# Altium PCB PCBv2.PcbDoc (part 1 of 2)
Units mil, origin at the board's own origin, x right, y up, seen from the top; angles counter-clockwise.
Board outline 3700.79 x 5244.09 mil, 2 copper layers (Top Layer, Bottom Layer); 35 components, 39 nets, 108 pads, 2885 vias.
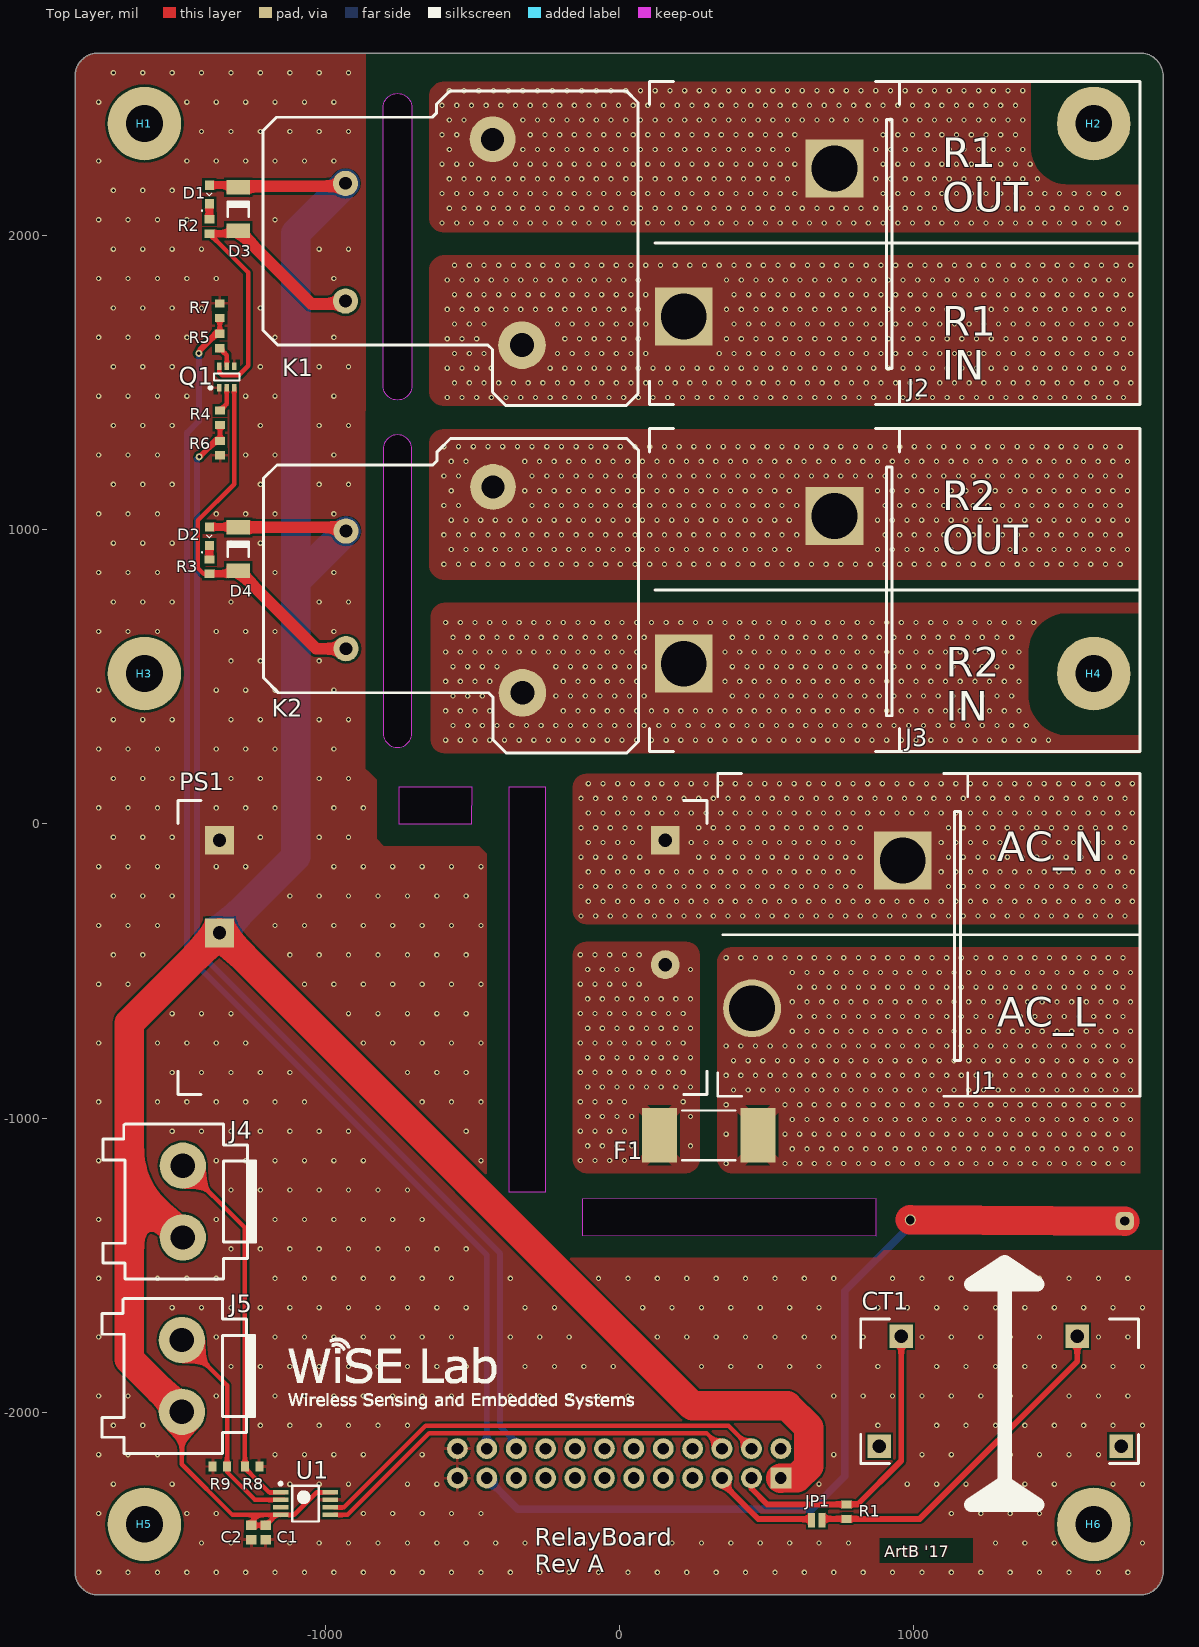
[diagram p0: Top Layer view]
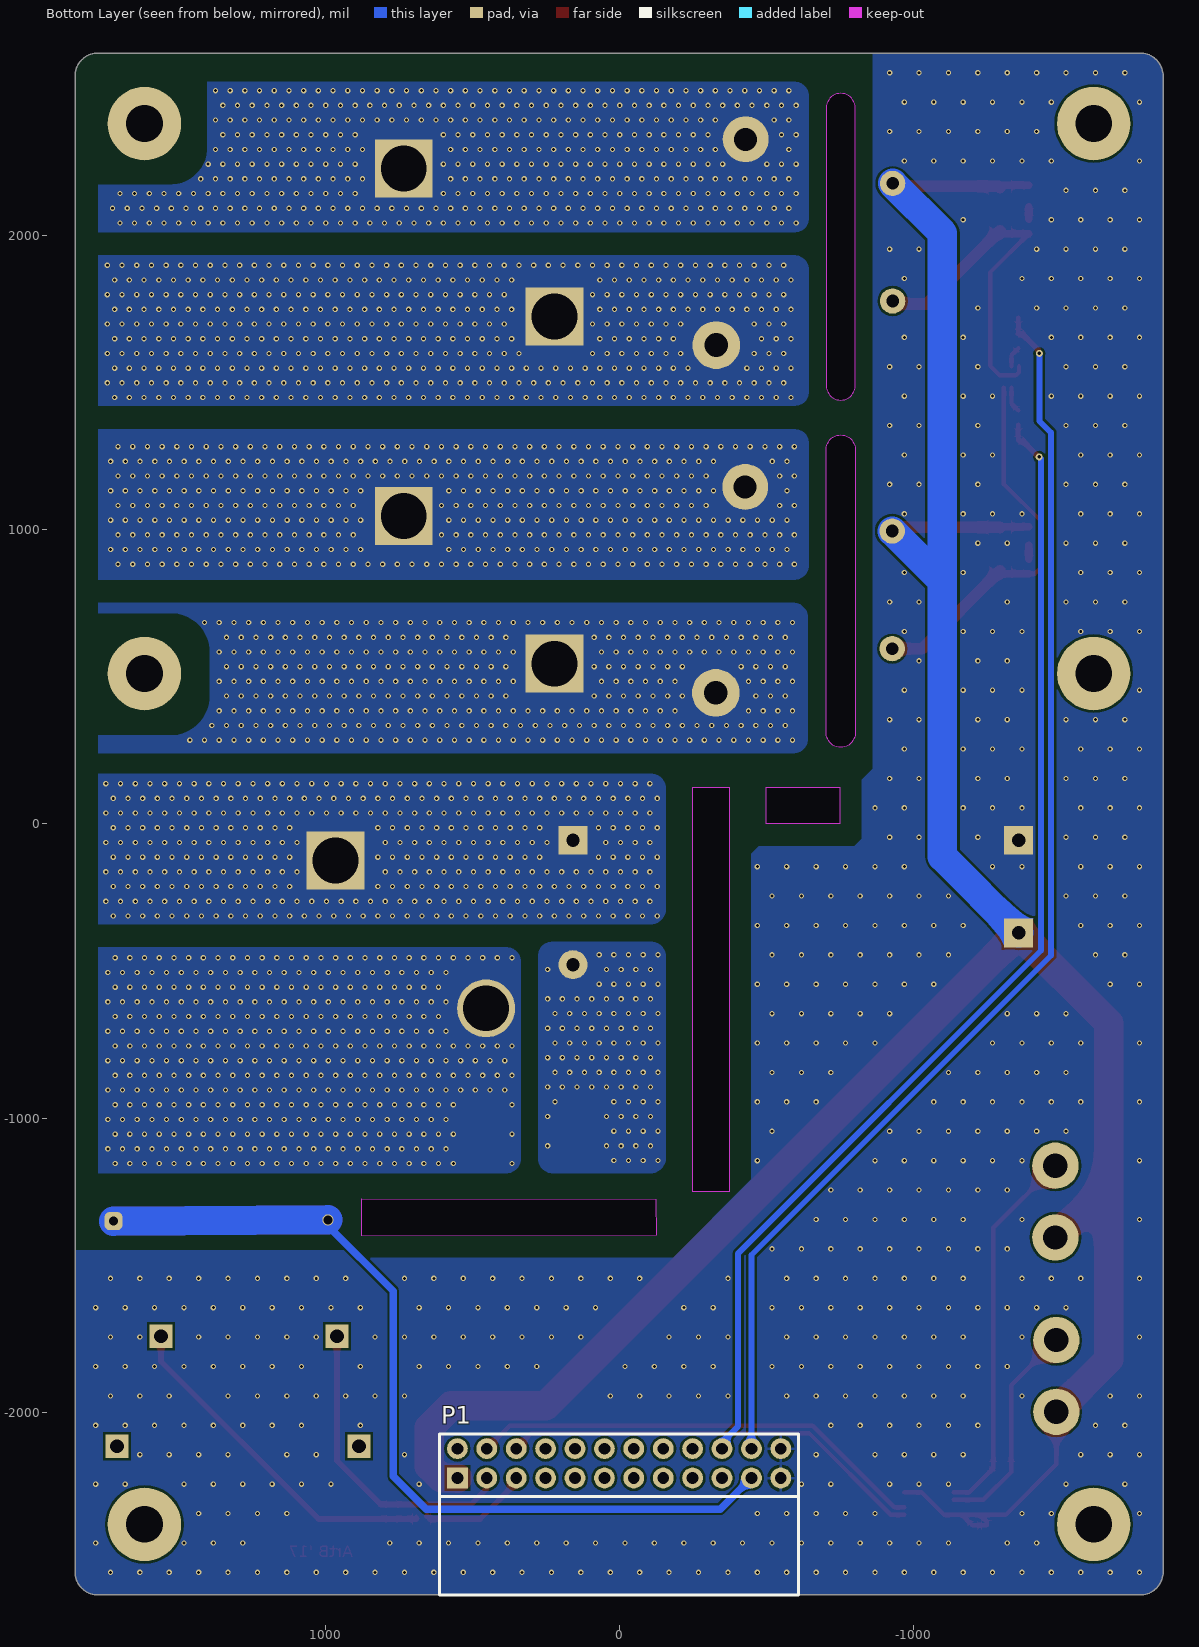
[diagram p1: Bottom Layer view, seen from below]

## Layer stack, top to bottom
Top Solder: solder mask 0.4, Solder Resist, Dk 3.5
Top Layer: signal copper 1.4
Dielectric 1: dielectric 12.6, FR-4, Dk 4.8
Bottom Layer: signal copper 1.4
Bottom Solder: solder mask 0.4, Solder Resist, Dk 3.5

## Board outline
-688.98,2622.05 688.98,2622.05 1771.65,2622.05 cw(c1771.65,2543.31) 1850.39,2543.31 1850.39,-2543.31 cw(c1771.65,-2543.31) 1771.65,-2622.05 -1771.65,-2622.05 cw(c-1771.65,-2543.31) -1850.39,-2543.31 -1850.39,2543.31 cw(c-1771.65,2543.31) -1771.65,2622.05
cut-out: -250.13,124.57 -375.34,124.31 -374.99,-1249.99 -250,-1249.99
cut-out: -500,125 -750,125 -750,0 -500.6,1.18
cut-out: -124.97,-1275.61 -125.78,-1399.14 875.03,-1399.98 875,-1275
cut-out: -802.89,1490.75 -802.89,2435.63 cw(c-753.67,2435.63) -753.67,2484.85 cw(c-753.67,2435.63) -704.46,2435.63 -704.46,1490.75 cw(c-753.67,1490.75) -753.67,1441.54 cw(c-753.67,1490.75)
cut-out: -753.67,1323.43 ccw(c-753.67,1274.22) -802.89,1274.22 -802.89,309.65 ccw(c-753.67,309.65) -753.67,260.44 ccw(c-753.67,309.65) -704.46,309.65 -704.46,1274.22 ccw(c-753.67,1274.22)

## Design rules (kind name [scope] priority, off if disabled: settings)
Clearance [All] p1: gap=8 ignorepadtopadclearanceinfootprint=FALSE
ComponentClearance "Ignore Enclosure Part" [InComponent('H1')] p1: gap=0 collisioncheckmode=3 verticalgap=0 showdistances=FALSE
HoleSize [All] p1: absolutevalues=TRUE maxlimit=200 minlimit=8 maxpercent=80.000 minpercent=20.000
HoleToHoleClearance [All] p1: gap=12 allowstackedmicrovias=TRUE
MinimumSolderMaskSliver MinimumSolderMaskSliver_jumpers [HasFootprint('PAD-JUMPER-2-NO_NO_SILK')] p1: minsoldermaskwidth=2
MinimumSolderMaskSliver [All] p2: minsoldermaskwidth=4
PolygonConnect PolygonConnect_Vias [(ObjectKind = 'Via') And (Net = 'GND') And (AsMils(ViaDiameter) = 18) And (AsMils(HoleDiameter) = 10) And (PadViaLibraryTemplate = 'v46h25m0mx0(1)')] p1: connectstyle=Direct reliefconductorwidth=10 reliefentries=4 polygonreliefangle="90 Angle" airgapwidth=10
PolygonConnect PolygonConnect_PS1 [HasFootprint('IRM-10-5')] p2: connectstyle=Direct reliefconductorwidth=40 reliefentries=4 polygonreliefangle="45 Angle" airgapwidth=10
PolygonConnect PolygonConnect_fUSE [HasFootprint('FUSE M10742X40L Schurter UMK 250 Series')] p3: connectstyle=Relief reliefconductorwidth=40 reliefentries=4 polygonreliefangle="45 Angle" airgapwidth=10
PolygonConnect PolygonConnect_HV [InNet('NEtF1_1') OR InNet('NetF1_2') OR InNet('NetJ1_2')  OR InNet('NetJ3_1')  OR InNet('NetJ3_2')  OR InNet('NetJ2_1')   OR InNet('NetJ2_2')] p4: connectstyle=Direct reliefconductorwidth=10 reliefentries=4 polygonreliefangle="90 Angle" airgapwidth=10
PolygonConnect [All] p5: connectstyle=Relief reliefconductorwidth=10 reliefentries=4 polygonreliefangle="90 Angle" airgapwidth=10
RoutingVias [All] p1: holewidth=28 width=50 viastyle="Through Hole" minholewidth=10 minwidth=20 maxholewidth=28 maxwidth=50
SilkToSilkClearance [All] p1: silktosilkclearance=8
SilkToSolderMaskClearance [IsPad] p1: minsilkscreentomaskgap=2 clearancetoexposedcopper=TRUE
SolderMaskExpansion [All] p1: expansion=4
Width [All] p1: maxlimit=500 minlimit=8 preferedwidth=25
24 further rules are at their usual default settings.

## Classes and differential pairs
polygon class PolygonClass_1: NETJ2_2_L01_P032
polygon class PolygonClass_2: NETJ2_2_L01_P032 NETJ2_2_L02_P060

## Components (designator, comment, footprint, x,y, rotation, side; value= is the part's Value field where it differs from the comment)
C1 "4.7uF" "CAPC1608X09L - CAP0603" -1201.5,-2409.81 r90 top
C2 "0.1uF" "CAPC1608X09L - CAP0603" -1250.75,-2409.81 r90 top
CT1 "Current Transformer" CT-CR8348 959.57,-1742.01 r0 top locked
D1 "Led Red" "LED-0603 .7MM TALL" -1393.44,2141.11 r90 top
D2 "Led Red" "LED-0603 .7MM TALL" -1393.44,978.94 r90 top
D3 "Diode" "SOD-80  MiniMELF" -1295.01,2091.14 r270 top
D4 "Diode" "SOD-80  MiniMELF" -1295.01,934.65 r270 top
F1 "Fuse 500mA" "FUSE M10742X40L Schurter UMK 250 Series" 304.7,-1058.69 r180 top
H1 "1/8in Hole by 1/4in Ring Fastener" "1/8in Fastener Hole"#1 -1614.17,2381.89 r0 top
H2 "1/8in Hole by 1/4in Ring Fastener" "1/8in Fastener Hole"#1 1614.17,2381.89 r0 top
H3 "1/8in Hole by 1/4in Ring Fastener" "1/8in Fastener Hole"#2 -1415.44,819.2 r0 top
H4 "1/8in Hole by 1/4in Ring Fastener" "1/8in Fastener Hole"#3 1409.91,829.91 r0 top
H5 "1/8in Hole by 1/4in Ring Fastener" "1/8in Fastener Hole"#4 -193.77,-1148.49 r0 top
H6 "1/8in Hole by 1/4in Ring Fastener" "1/8in Fastener Hole"#1 1614.17,-2381.89 r0 top
J1 "High Voltage Connector" "2POS Barrier Block Terminal"#1 452.22,-626.82 r90 top locked
J2 "High Voltage Connector" "2POS Barrier Block Terminal"#2 220.03,1726.34 r90 top locked (schematic designator J3)
J3 "High Voltage Connector" "2POS Barrier Block Terminal"#2 220.03,545.23 r90 top locked (schematic designator J4)
J4 "Thrmistor Connector" "2POS JST B02P-VL" -1483.78,-1284.13 r270 top locked
J5 "Thrmistor Connector" "2POS JST B02P-VL" -1487.04,-1876.99 r270 top locked
JP1 "JUMPER-PAD-2-NO" PAD-JUMPER-2-NO_NO_SILK 672.2,-2367.61 r0 top
K1 "Power Relay" T9AS1D12-5 -655.45,1953.55 r270 top locked
K2 "Power Relay" T9AS1D12-5 -653.87,771.26 r270 top locked
P1 "0.1\" Pitch, 2 Row, 24 Pos, Female, Right-Angle" "0.1 INCH 2 ROW 24 POS FEMALE RIGHT-ANGLE HEADER SULLINS" 0,-2174.41 r180 bottom locked
PS1 "AC/DC Power Supply" IRM-10-5 298.68,-919.49 r180 top
Q1 "NPN MOSFET" "SC-70-6  (SOT-363)" -1334.38,1520.28 r90 top
R1 "VAL?" "RESC1608X06L - RES0603" 773.45,-2338.6 r90 top
R2 "150" "RESC1608X06L - RES0603" -1393.44,2032.09 r90 top (schematic designator R1)
R3 "150" "RESC1608X06L - RES0603" -1393.44,875.59 r90 top (schematic designator R2)
R4 "1K" "RESC1608X06L - RES0603" -1357.09,1381.89 r90 top
R5 "1K" "RESC1608X06L - RES0603" -1358.13,1642.65 r270 top
R6 "10K" "RESC1608X06L - RES0603" -1357.09,1278.54 r90 top
R7 "10K" "RESC1608X06L - RES0603" -1358.13,1746 r270 top
R8 "10K" "RESC1608X06L - RES0603" -1248.06,-2184.7 r180 top
R9 "10K" "RESC1608X06L - RES0603" -1357.95,-2185.1 r0 top
U1 "ADC" "8L UMAX/USOP TSOP65P490X110-8L" -1066.65,-2311.17 r0 top

## Footprints (in the part's own frame and the unit in brackets; to place one, negate y for a bottom-side part, rotate by r counter-clockwise, add the part's x,y. Pads: shape width x height; smd on the part's side, far side on the other; paste and mask are expansions set on the pad)
"0.1 INCH 2 ROW 24 POS FEMALE RIGHT-ANGLE HEADER SULLINS" [mm] "Sullins 0.1\" Dual row 24 position female right-angle header"
  rect 1.8x1.8 hole 1.02: 1(-13.97,-1.27)
  round 1.8 hole 1.02: 2(-13.97,1.27) 3(-11.43,-1.27) 4(-11.43,1.27) 5(-8.89,-1.27) 6(-8.89,1.27) 7(-6.35,-1.27) 8(-6.35,1.27) 9(-3.81,-1.27) 10(-3.81,1.27) 11(-1.27,-1.27) 12(-1.27,1.27) 13(1.27,-1.27) 14(1.27,1.27) 15(3.81,-1.27) 16(3.81,1.27) 17(6.35,-1.27) 18(6.35,1.27) 19(8.89,-1.27) 20(8.89,1.27) 21(11.43,-1.27) 22(11.43,1.27) 23(13.97,-1.27) 24(13.97,1.27)
  silkscreen extent -15.5,-11.37 15.5,2.54, body extent -15.49,-11.34 15.49,1.5, height 5.08
"1/8in Fastener Hole"#1 [mil]
  round 250 hole 125: 1(0,0)
"1/8in Fastener Hole"#2 [mil]
  round 250 hole 125: 1(-198.73,-307.39)
"1/8in Fastener Hole"#3 [mil]
  round 250 hole 125: 1(204.27,-318.1)
"1/8in Fastener Hole"#4 [mil]
  round 250 hole 125: 1(-1420.4,-1233.4)
"2POS Barrier Block Terminal"#1 [mm] "CONN BARRIER STRIP 2CIRC 0.5\""
  round 5 hole 3.96: 1(0,0)
  rect 5x5 hole 3.96: 2(12.766,-13.018)
  silkscreen extent -7.6,-18.63 20.3,2.97, body extent -7.64,-18.62 20.3,2.97, height 22.61
"2POS Barrier Block Terminal"#2 [mm] "CONN BARRIER STRIP 2CIRC 0.5\""
  rect 5x5 hole 3.96: 1(0,0) 2(12.766,-13.018)
  silkscreen extent -7.6,-18.63 20.3,2.97, body extent -7.64,-18.62 20.3,2.97, height 22.61
"2POS JST B02P-VL" [mm] "CONN HEADER 2POS VL SERIES TIN"
  round 4 hole 2.1: 1(-3.1,0) 2(3.1,0)
  silkscreen extent -6.7,-6.9 6.7,6.3, body extent -6.7,-6.9 6.7,6.3, height 16.4
"8L UMAX/USOP TSOP65P490X110-8L" [mm] "TSOP, 8-Leads, Body 3.00x3.00mm, Pitch 0.65mm, IPC High Density"
  rect 1.35x0.4 smd mask+0.051: 1(-2.15,0.975) 2(-2.15,0.325) 3(-2.15,-0.325) 4(-2.15,-0.975) 5(2.15,-0.975) 6(2.15,-0.325) 7(2.15,0.325) 8(2.15,0.975)
  silkscreen extent -2.27,-1.55 1.15,1.85, body extent -2.51,-1.55 2.52,1.55, height 1.09
"CAPC1608X09L - CAP0603" [mm] "Chip Capacitor, 2-Leads, Body 1.60x0.80mm, IPC High Density"
  rect 0.8x0.9 smd: 1(-0.625,0) 2(0.625,0)
  body extent -0.87,-0.48 0.87,0.48, height 0.9
CT-CR8348 [mm] "TRANSF CURRENT .27\" OPENING PCB CR8348-2000"
  rect 2x2 hole 1.2: 1(0,0) 2(15.2,0) ""(-1.9,-9.5) ""(19,-9.5)
  silkscreen extent -3.5,-11 20.5,1.5, body extent -3.5,-10.1 20.5,0.6, height 25
"FUSE M10742X40L Schurter UMK 250 Series" [mm] "Molded Capacitor, 2-Leads, Body 10.70x4.20mm, IPC High Density"
  rect 3x4.7 smd: 1(-4.25,0) 2(4.25,0)
  silkscreen extent -2.29,-2.15 2.29,2.15, body extent -5.65,-2.11 5.65,2.09, height 3.97
IRM-10-5 [mm] "AC/DC Power Modules 5V 2A 10W 85-264Vin Encap PS"
  round 2.5 hole 1.15: AC1(3.6,-11.2)
  rect 2.5x2.5 hole 1.15: AC2(3.6,-21.95) V+(42.1,-13.95) V-(42.1,-21.95)
  silkscreen extent 0,-25.4 45.7,0, body extent 0,-25.4 45.7,0, height 21.5
"LED-0603 .7MM TALL" [mm] "Chip Diode, 2-Leads, Body 1.60x0.80mm, IPC High Density"
  rect 0.8x0.8 smd: A(0.8,0) K(-0.8,0)
  silkscreen extent -1.45,-0.25 0.13,0.68, body extent -1.01,-0.54 1.01,0.53, height 0.6
PAD-JUMPER-2-NO_NO_SILK [mil]
  rect 25x50 smd: 1(-17.72,0) 2(17.72,0)
"RESC1608X06L - RES0603" [mm] "Chip Resistor, 2-Leads, Body 1.60x0.80mm, IPC High Density"
  rect 0.7x0.85 smd: 1(-0.625,0) 2(0.625,0)
  body extent -0.87,-0.48 0.87,0.48, height 0.55
"SC-70-6  (SOT-363)" [mm] "TSOP, 6-Leads, Body 2.00x1.25mm, Pitch 0.65mm, IPC High Density"
  rect 0.648x0.406 smd mask+0.051: 1(-0.919,0.65) 2(-0.919,0) 3(-0.919,-0.65) 4(0.919,-0.65) 5(0.919,0) 6(0.919,0.65)
  silkscreen extent -1.04,-1.1 0.3,1.53, body extent -1.05,-1.1 1.05,1.1, height 1
"SOD-80  MiniMELF" [mm] "MELF Diode, 2-Leads, Body 3.50x1.50mm, IPC High Density"
  rect 1.25x2 smd: 1(-1.875,0) 2(1.875,0)
  silkscreen extent -0.65,-0.9 0.65,0.9, body extent -1.75,-0.75 1.75,0.75, height 1.5
T9AS1D12-5 [mil] "RELAY GEN PURPOSE SPST 30A 5V"
  round 162 hole 81: 1(325,325)
  round 156 hole 78: 2(-375,225)
  round 86 hole 43: 3(175,-275) 4(-225,-275)
  silkscreen extent -540,-555 530,720, body extent -545,-555 535,725, height 806

## Part data
C1: library part "CAP0603 4.7uF 10% 6.3V X7R", "SMT 0603 Ceramic Capacitor", Supplier Part Number 1=1276-2087-1-ND, TempCoeff=X7R, Tolerance=10%, Voltage=6.3V, Supplier 1=Digi-Key
C2: library part "CAP0603 0.1uF 10% 25V X7R", "SMT 0603 Ceramic Capacitor", Supplier Part Number 1=311-1341-1-ND, TempCoeff=X7R, Tolerance=10%, Voltage=25V, Supplier 1=Digi-Key, Supplier 2=Digi-Key, Supplier Part Number 2=490-1524-1-ND
CT1: library part "CT CR8348-2000", "TRANSF CURRENT .27\" OPENING PCB 50A", Supplier Part Number 1=582-1010-ND, Supplier 1=Digi-Key, url=https://www.digikey.com/product-detail/en/cr-magnetics-inc/CR8348-2000/582-1010-ND/1045166
D1 D2: library part "LED0603 RED 20mA 250mcd", "LED RED CLEAR 0603 SMD 250 mcd", Supplier Part Number 1=732-4978-1-ND, Supplier 1=Digi-Key
D3 D4: library part "Diode LL4150GS18", "DIODE GEN 50V 600MA MINI MELF", Supplier Part Number 1=LL4150GS18GICT-ND, Supplier 1=Digi-Key
F1: library part FUSE-Schurter-3404.2463.22, "FUSE UMK 250 FUSE WITH HOLDER 500MA F", Supplier Part Number 1=486-3187-1-ND, Supplier 1=Digi-Key, url=https://www.digikey.com/product-detail/en/3404.2463.22/486-3187-1-ND/5225261?curr=usd&WT.z_cid=ref_octopart_dkc_buynow&site=us
H1 H2 H3 H4 H5 H6: library part "1/8in by 1/4in Fastner Hole"
J1 J2 J3: library part "2POS CONN BARRIER STRIP 2CIRC 0.5\" 45A 600V", "MOLEX  0386608802", Supplier Part Number 1=WM4395-ND, Supplier 1=Digi-Key, url=http://www.mouser.com/ProductDetail/Molex/38660-8802/?qs=sGAEpiMZZMsntO7gZZwOWBznzzIjRi3IH61qEmgvOKA%3d
J4 J5: library part "2POS Thermistor Connector B02P-VL", "JST B02P-VL CONN HEADER 2POS VL SERIES TIN", Supplier Part Number 1=455-2361-ND, Supplier 1=Digi-Key, url=https://www.digikey.com/products/en?mpart=B02P-VL&v=455
K1 K2: library part T9AS1D12-5, "Single-Pole Single-Throw Relay", Supplier Part Number 1=PB1014-ND, Part Number=T9AS1D12-5, Supplier 1=Digi-Key
P1: library part "0.1\" 2 row 24 position female right-angle header sullins", "Sullins 0.1\" 2 row 24 position female right-angle header", Supplier Part Number 1=S5526-ND, Pitch=2.54mm, Positions=24, Rows=2, Supplier 1=Digi-Key, Supplier 2=Digi-Key, Supplier Part Number 2=S5565-ND
PS1: library part IRM-10-5, "AC/DC Power Modules 5V 2A 10W 85-264Vin Encap PS", Supplier Part Number 1=70387823, Mouser Link=http://www.mouser.com/ProductDetail/Mean-Well/IRM-10-5/?qs=sGAEpiMZZMuWiaalG5TUgH52QN1%252bIKAVGLeN4i9HrWU2QI8q%2fOO4Cw%3d%3d, Supplier 1=Allied, Supplier 2=Mouser, Supplier Part Number 2="Anonymous Daily Limit Reached"
Q1: library part SI1922EDH-T1-GE3CT, "2N-CH NPN MOSFET 20V 1.3A SOT-363", Supplier Part Number 1=SI1922EDH-T1-GE3CT-ND, Supplier 1=Digi-Key
R1: library part RES0603, "SMT 0603 Ceramic Resistor"
R2 R3: library part "RES0603 150 1% 1/10W_1", "SMT 0603 Ceramic Resistor", Supplier Part Number 1=311-150HRCT-ND, Supplier 1=Digi-Key
R4 R5: library part "RES0603 1K 1% 1/10W", "SMT 0603 Ceramic Resistor", Power=1/10W, Supplier Part Number 1=311-1.00KHRCT-ND, Tolerance=1%, Supplier 1=Digi-Key, Supplier 2=Digi-Key, Supplier 3=Digi-Key, Supplier Part Number 2=P1.00KHCT-ND, Supplier Part Number 3=RMCF0603FG1K00CT-ND
R6 R7 R8 R9: library part "RES0603 10K 1% 1/10W", "SMT 0603 Ceramic Resistor", Power=1/10W, Supplier Part Number 1=311-10.0KHRCT-ND, Tolerance=1%, Supplier 1=Digi-Key, Supplier 2=Digi-Key, Supplier 3=Digi-Key, Supplier Part Number 2=RMCF0603FT10K0CT-ND, Supplier Part Number 3=P10.0KHCT-ND
U1: library part MAX11612EUA+, "IC ADC I2C/SRL 12BIT 4CH 8UMAX", Supplier Part Number 1=MAX11612EUA+-ND, Supplier 1=Digi-Key, url=https://www.digikey.com/product-detail/en/maxim-integrated/MAX11612EUA-/MAX11612EUA--ND/2061925

## Free pads (board coordinates)
  round 24 hole 12: 2(-1428.57,1248.52) 3(-1429.25,1600.59)
  round 38 hole 30: 4(990.39,-1346.49)
  rrect60% 62x62 hole 31: 4(1719.62,-1350.46)

## Via types
v1: diameter 18, hole 10, Top Layer to Bottom Layer, tented both sides, 2885 vias

## Nets (pads, with @x,y where several pads share a name; then routed paths per layer and width w, separated by ;. In a path a pad name is that pad's centre, name@x,y a point inside that pad or via, vN(x,y) a via of type N, cw(c..) or ccw(c..) an arc to the next point about the centre after c; other vN are vias at no path point)
3.3V: P1.2
5V: C1.2 C2.2 D1.A D2.A D3.1 D4.1 J4.2 J5.2 K1.4 K2.4 P1.1 PS1.V+ U1.4 U1.8 | length 9910.8
  Top Layer w10: D4.1@-1296.69,1010.66 -1296.98,1010.44 D4.1@-1277.3,1010.44
  Top Layer w15: J5.2@-1487.04,-1999.04 -1487.04,-2177.53 -1314.9,-2349.67 -1226.83,-2349.67 ; U1.4@-1151.3,-2349.67 -1138.75,-2349.67 -1138.75,-2349.45 -1104.93,-2349.45 -1028.38,-2272.9 U1.8@-969.46,-2272.9 ; -1226.83,-2349.67 -1250.75,-2373.59 C2.2@-1250.75,-2385.21 C1.2@-1201.5,-2385.21 U1.4@-1165.96,-2349.67 ; -1226.83,-2349.67 U1.4@-1165.96,-2349.67 ; U1.4@-1165.96,-2349.67 -1151.41,-2349.67 U1.4@-1151.3,-2349.56 -1165.85,-2349.56 U1.4@-1165.96,-2349.67
  Top Layer w25: D2.A@-1393.44,1010.44 D4.1@-1296.98,1010.44 ; D1.A@-1393.44,2172.6 -1302.65,2172.6 D3.1@-1295.01,2164.96
  Top Layer w40: D4.1@-1295.01,1008.47 -1295.01,1008.98 -941.59,1008.98 K2.4@-928.87,996.26 ; D3.1@-1295.01,2164.96 -1291.27,2168.7 K1.4@-930.45,2168.7
  Top Layer w100: J5.2@-1487.04,-1999.04 -1665.3,-1820.77 -1665.3,-1224.66 ; J4.2@-1483.78,-1406.18 -1665.3,-1224.66 ; P1.1@550,-2224.41 549.34,-2224.32 604.26,-2224.32 645.43,-2183.9 645.43,-2052.58 571.83,-1978.98 249.9,-1978.98 PS1.V+@-1358.8,-370.28 -1665.3,-676.78 -1665.3,-1224.66
  Bottom Layer w100: PS1.V+@-1358.8,-370.28 -1099.44,-110.91 -1099.44,834.71 ; K1.4@-930.45,2178.55 -1099.44,2009.56 -1099.44,834.71 ; K2.4@-928.87,996.26 -1090.43,834.71 -1099.44,834.71
60HzAnt: P1.21 pad.4 | length 2271.7
  Bottom Layer w25: P1.21@-450,-2224.41 -344.37,-2330.04 655.82,-2330.04 767.94,-2217.91 767.94,-1588.24 990.39,-1365.79 pad.4@990.39,-1346.49
AIN0: J4.1 R8.2 U1.1 | length 1284
  Top Layer w15: J4.1@-1483.78,-1162.08 -1272.66,-1373.21 R8.2@-1272.66,-2184.7 -1272.66,-2190.74 -1190.51,-2272.9 U1.1@-1138.75,-2272.9
AIN1: J5.1 R9.2 U1.2 | length 746.3
  Top Layer w15: J5.1@-1487.04,-1754.94 -1333.34,-1908.64 R9.2@-1333.34,-2185.1 -1333.34,-2203.77 -1238.62,-2298.49 U1.2@-1138.75,-2298.49
CT_N: JP1.1 P1.5 | length 375.5
  Top Layer w20: P1.5@350,-2224.41 350,-2240.57 473.3,-2363.87 643.2,-2363.87 JP1.1@653.86,-2353.21
CT_P: CT1.1 P1.3 R1.2 | length 1052.6
  Top Layer w20: P1.3@450,-2224.41 450,-2260.14 503.86,-2313.99 R1.2@773.45,-2313.99 811.04,-2313.99 959.57,-2165.46 CT1.1@959.57,-1742.01
GND: C1.1 C2.1 P1.23 P1.24 PS1.V- Q1.1 Q1.4 R6.1 R7.1 R8.1 R9.1 U1.7
  other v1: -1770,-2545 -1670,-2545 -1570,-2545 -1470,-2545 -1370,-2545 -1270,-2545 -1170,-2545 -1070,-2545 -970,-2545 -870,-2545 -770,-2545 -670,-2545 -570,-2545 -470,-2545 -370,-2545 -270,-2545 -170,-2545 -70,-2545 30,-2545 130,-2545 230,-2545 330,-2545 430,-2545 530,-2545 630,-2545 730,-2545 830,-2545 930,-2545 1030,-2545 1130,-2545 1230,-2545 1330,-2545 1430,-2545 1530,-2545 1630,-2545 1730,-2545 -1420,-2445 -1320,-2445 -1120,-2445 -1020,-2445 -920,-2445 -820,-2445 -720,-2445 -620,-2445 -520,-2445 -420,-2445 -320,-2445 -220,-2445 -120,-2445 -20,-2445 80,-2445 180,-2445 280,-2445 380,-2445 480,-2445 580,-2445 680,-2445 780,-2445 1280,-2445 1380,-2445 1480,-2445 1780,-2445 -1770,-2345 -1470,-2345 -1370,-2345 -870,-2345 -770,-2345 -670,-2345 -570,-2345 -470,-2345 1130,-2345 1230,-2345 1330,-2345 1430,-2345 -1720,-2245 -1520,-2245 -1120,-2245 -1020,-2245 -920,-2245 -720,-2245 -620,-2245 680,-2245 980,-2245 1080,-2245 1180,-2245 1280,-2245 1380,-2245 1480,-2245 1680,-2245 1780,-2245 -1770,-2145 -1670,-2145 -1570,-2145 -1170,-2145 -1070,-2145 -970,-2145 -870,-2145 -670,-2145 730,-2145 1030,-2145 1130,-2145 1330,-2145 1430,-2145 1530,-2145 1630,-2145 -1720,-2045 -1620,-2045 -1220,-2045 -1120,-2045 -1020,-2045 -920,-2045 -820,-2045 -720,-2045 880,-2045 1080,-2045 1180,-2045 1280,-2045 1380,-2045 1480,-2045 1580,-2045 1680,-2045 1780,-2045 -1770,-1945 -1670,-1945 -1370,-1945 -1170,-1945 -1070,-1945 -970,-1945 -870,-1945 -770,-1945 -670,-1945 -570,-1945 -370,-1945 -270,-1945 -170,-1945 -70,-1945 30,-1945 730,-1945 830,-1945 930,-1945 1030,-1945 1130,-1945 1230,-1945 1330,-1945 1530,-1945 1630,-1945 1730,-1945 -1320,-1845 -1220,-1845 -1120,-1845 -1020,-1845 -920,-1845 -820,-1845 -720,-1845 -620,-1845 -520,-1845 -320,-1845 -220,-1845 -120,-1845 -20,-1845 280,-1845 380,-1845 480,-1845 580,-1845 680,-1845 880,-1845 1080,-1845 1180,-1845 1280,-1845 1380,-1845 1480,-1845 1580,-1845 1680,-1845 1780,-1845 -1770,-1745 -1370,-1745 -1170,-1745 -1070,-1745 -970,-1745 -870,-1745 -770,-1745 -670,-1745 -570,-1745 -370,-1745 -270,-1745 -170,-1745 130,-1745 230,-1745 330,-1745 430,-1745 530,-1745 630,-1745 730,-1745 830,-1745 1030,-1745 1130,-1745 1230,-1745 1330,-1745 1430,-1745 1630,-1745 1730,-1745 -1520,-1645 -1420,-1645 -1320,-1645 -1220,-1645 -1120,-1645 -1020,-1645 -920,-1645 -820,-1645 -720,-1645 -620,-1645 -520,-1645 -320,-1645 -220,-1645 80,-1645 180,-1645 280,-1645 380,-1645 480,-1645 580,-1645 680,-1645 880,-1645 980,-1645 1080,-1645 1180,-1645 1280,-1645 1380,-1645 1480,-1645 1580,-1645 1680,-1645 1780,-1645 -1770,-1545 -1570,-1545 -1470,-1545 -1370,-1545 -1170,-1545 -1070,-1545 -970,-1545 -870,-1545 -770,-1545 -670,-1545 -570,-1545 -370,-1545 -70,-1545 30,-1545 130,-1545 230,-1545 330,-1545 430,-1545 530,-1545 630,-1545 730,-1545 930,-1545 1030,-1545 1130,-1545 1230,-1545 1330,-1545 1430,-1545 1530,-1545 1630,-1545 1730,-1545 -1320,-1445 -1220,-1445 -1120,-1445 -1020,-1445 -920,-1445 -820,-1445 -720,-1445 -620,-1445 -520,-1445 -1770,-1345 -1370,-1345 -1170,-1345 -1070,-1345 -970,-1345 -870,-1345 -770,-1345 -670,-1345 -1320,-1245 -1220,-1245 -1120,-1245 -1020,-1245 -920,-1245 -820,-1245 -720,-1245 -1770,-1145 -1370,-1145 -1270,-1145 -1170,-1145 -1070,-1145 -970,-1145 -870,-1145 -470,-1145 -1520,-1045 -1420,-1045 -1320,-1045 -1220,-1045 -1120,-1045 -1020,-1045 -920,-1045 -520,-1045 -1770,-945 -1570,-945 -1470,-945 -1370,-945 -1270,-945 -1170,-945 -1070,-945 -670,-945 -570,-945 -470,-945 -1520,-845 -1420,-845 -1320,-845 -1220,-845 -1120,-845 -720,-845 -620,-845 -520,-845 -1770,-745 -1570,-745 -1470,-745 -1370,-745 -1270,-745 -870,-745 -770,-745 -670,-745 -570,-745 -470,-745 -1520,-645 -1420,-645 -1320,-645 -920,-645 -820,-645 -720,-645 -620,-645 -520,-645 -1770,-545 -1670,-545 -1070,-545 -970,-545 -870,-545 -770,-545 -670,-545 -570,-545 -470,-545 -1720,-445 -1620,-445 -1120,-445 -1020,-445 -920,-445 -820,-445 -720,-445 -620,-445 -520,-445 -1770,-345 -1670,-345 -1570,-345 -1170,-345 -1070,-345 -970,-345 -870,-345 -770,-345 -670,-345 -570,-345 -470,-345 -1720,-245 -1620,-245 -1520,-245 -1120,-245 -1020,-245 -920,-245 -820,-245 -720,-245 -620,-245 -520,-245 -1770,-145 -1670,-145 -1570,-145 -1370,-145 -1270,-145 -970,-145 -870,-145 -770,-145 -670,-145 -570,-145 -470,-145 -1720,-45 -1620,-45 -1520,-45 -1220,-45 -1020,-45 -920,-45 -1770,55 -1670,55 -1570,55 -1370,55 -1270,55 -1170,55 -970,55 -870,55 -1720,155 -1620,155 -1520,155 -1320,155 -1220,155 -1020,155 -920,155 -1770,255 -1670,255 -1570,255 -1370,255 -1270,255 -1170,255 -970,255 -1720,355 -1620,355 -1520,355 -1320,355 -1220,355 -1020,355 -920,355 -1770,455 -1370,455 -1270,455 -1170,455 -970,455 -1320,555 -1220,555 -1020,555 -1770,655 -1670,655 -1570,655 -1370,655 -1270,655 -1170,655 -970,655 -1720,755 -1620,755 -1520,755 -1320,755 -1020,755 -920,755 -1770,855 -1670,855 -1570,855 -1170,855 -970,855 -1720,955 -1620,955 -1520,955 -1320,955 -1220,955 -1770,1055 -1670,1055 -1570,1055 -1370,1055 -1270,1055 -1170,1055 -970,1055 -1720,1155 -1620,1155 -1520,1155 -1220,1155 -1020,1155 -920,1155 -1770,1255 -1670,1255 -1570,1255 -1270,1255 -1170,1255 -970,1255 -1720,1355 -1620,1355 -1520,1355 -1220,1355 -1020,1355 -920,1355 -1770,1455 -1670,1455 -1570,1455 -1470,1455 -1270,1455 -1170,1455 -970,1455 -1720,1555 -1620,1555 -1520,1555 -1220,1555 -1020,1555 -920,1555 -1770,1655 -1670,1655 -1570,1655 -1470,1655 -1170,1655 -970,1655 -1720,1755 -1620,1755 -1520,1755 -1420,1755 -1220,1755 -1770,1855 -1670,1855 -1570,1855 -1470,1855 -1370,1855 -970,1855 -1720,1955 -1620,1955 -1520,1955 -1420,1955 -1020,1955 -920,1955 -1770,2055 -1670,2055 -1570,2055 -1470,2055 -1170,2055 -1720,2155 -1620,2155 -1520,2155 -1770,2255 -1470,2255 -1370,2255 -1270,2255 -1170,2255 -1070,2255 -970,2255 -1420,2355 -1320,2355 -1220,2355 -1120,2355 -1020,2355 -920,2355 -1770,2455 -1470,2455 -1370,2455 -1270,2455 -1170,2455 -1070,2455 -970,2455 -1720,2555 -1620,2555 -1520,2555 -1420,2555 -1320,2555 -1220,2555 -1120,2555 -1020,2555 -920,2555
GPIO1: P1.8
GPIO2: P1.10
GPIO3: P1.12
GPIO4: P1.14
GPIO5: P1.16
GPIO6: P1.18
GPIO7: P1.20 pad.2 R4.1 R6.2 | length 3972.9
  Top Layer w15: pad.2@-1428.57,1248.52 pad.2@-1421.72,1253.46 ; R6.2@-1372.02,1303.15 R6.2@-1357.09,1303.15 R4.1@-1357.09,1357.28
  Top Layer w20: pad.2@-1421.72,1253.46 R6.2@-1372.02,1303.15
  Bottom Layer w20: pad.2@-1428.57,1248.52 -1435.1,1242 -1435.1,-430.05 -404.85,-1460.3 -404.85,-2047.96 -350,-2102.81 P1.20@-350,-2124.41
GPIO8: P1.22 pad.3 R5.1 R7.2 | length 4319.8
  Top Layer w15: R5.1@-1358.13,1667.26 R7.2@-1358.13,1721.39
  Top Layer w20: pad.3@-1429.25,1600.59 -1424.53,1613.03 -1370.3,1667.26 R5.1@-1358.13,1667.26
  Bottom Layer w20: pad.3@-1429.25,1600.59 -1429.25,1370.61 -1468.93,1330.93 -1468.93,-447.1 -450,-1466.03 P1.22@-450,-2124.41
I2C_SCL: P1.6 U1.5 | length 1456.6
  Top Layer w15: U1.5@-969.46,-2349.67 -969.25,-2349.45 -923.71,-2349.45 -645.74,-2071.48 297.07,-2071.48 P1.6@350,-2124.41
I2C_SDA: P1.4 U1.6 | length 1566.9
  Top Layer w15: U1.6@-969.46,-2324.08 -969.46,-2323.86 -935.64,-2323.86 -658.25,-2046.48 372.07,-2046.48 P1.4@450,-2124.41
Leak_N: P1.13
Leak_P: P1.11
Mic_In: P1.15
NetCT1_2: CT1.2 JP1.2 R1.1 | length 1177.7
  Top Layer w10: JP1.2@689.3,-2353.21 JP1.2@690.3,-2353.33
  Top Layer w20: JP1.2@689.21,-2362.48 689.94,-2363.21 R1.1@773.45,-2363.21 1022.61,-2363.21 1557.99,-1827.82 CT1.2@1557.99,-1742.01
NetD1_K: D1.K R2.2 | length 42.3
  Top Layer w25: R2.2@-1393.44,2056.7 D1.K@-1393.44,2099.02
NetD2_K: D2.K R3.2 | length 47.2
  Top Layer w25: R3.2@-1393.44,900.2 D2.K@-1393.44,947.44
NetD3_2: D3.2 K1.3 Q1.6 R2.1 | length 1209.8
  Top Layer w15: R2.1@-1393.44,2007.48 -1261.7,1875.75 -1261.7,1558.05 -1293.55,1526.2 -1349.62,1526.2 -1359.88,1536.45 -1359.88,1556.46 Q1.6@-1359.97,1556.46
  Top Layer w25: R2.1@-1393.44,2007.48 -1304.86,2007.48 D3.2@-1295.01,2017.33
  Top Layer w40: D3.2@-1295.01,2017.33 -1046.39,1768.7 K1.3@-930.45,1768.7
NetD4_2: D4.2 K2.3 Q1.3 R3.1 | length 1290.5
  Top Layer w10: D4.2@-1304.86,850.99 D4.2@-1295.01,860.83
  Top Layer w15: R3.1@-1393.44,850.99 -1413.12,850.99 -1432.81,870.67 -1432.81,1031.85 -1308.79,1155.87 Q1.3@-1308.79,1484.1
  Top Layer w25: R3.1@-1393.44,850.99 D4.2@-1304.86,850.99
  Top Layer w40: D4.2@-1295.01,860.83 -1030.45,596.26 K2.3@-928.87,596.26
NetF1_1: F1.1 J1.1 | length 55.7
  Top Layer w10: J1.1@452.22,-626.82 J1.1@491.59,-666.19
  other v1: 363.91,-1154.87 563.91,-1154.87 613.91,-1154.87 663.91,-1154.87 713.91,-1154.87 763.91,-1154.87 813.91,-1154.87 863.91,-1154.87 913.91,-1154.87 963.91,-1154.87 1013.91,-1154.87 1063.91,-1154.87 1113.91,-1154.87 1163.91,-1154.87 1213.91,-1154.87 1263.91,-1154.87 1313.91,-1154.87 1363.91,-1154.87 1413.91,-1154.87 1463.91,-1154.87 1513.91,-1154.87 1563.91,-1154.87 1613.91,-1154.87 1663.91,-1154.87 1713.91,-1154.87 588.91,-1104.87 638.91,-1104.87 688.91,-1104.87 738.91,-1104.87 788.91,-1104.87 838.91,-1104.87 888.91,-1104.87 938.91,-1104.87 988.91,-1104.87 1038.91,-1104.87 1088.91,-1104.87 1138.91,-1104.87 1188.91,-1104.87 1238.91,-1104.87 1288.91,-1104.87 1338.91,-1104.87 1388.91,-1104.87 1438.91,-1104.87 1488.91,-1104.87 1538.91,-1104.87 1588.91,-1104.87 1638.91,-1104.87 1688.91,-1104.87 1738.91,-1104.87 363.91,-1054.87 563.91,-1054.87 613.91,-1054.87 663.91,-1054.87 713.91,-1054.87 763.91,-1054.87 813.91,-1054.87 863.91,-1054.87 913.91,-1054.87 963.91,-1054.87 1013.91,-1054.87 1063.91,-1054.87 1113.91,-1054.87 1163.91,-1054.87 1213.91,-1054.87 1263.91,-1054.87 1313.91,-1054.87 1363.91,-1054.87 1413.91,-1054.87 1463.91,-1054.87 1513.91,-1054.87 1563.91,-1054.87 1613.91,-1054.87 1663.91,-1054.87 1713.91,-1054.87 588.91,-1004.87 638.91,-1004.87 688.91,-1004.87 738.91,-1004.87 788.91,-1004.87 838.91,-1004.87 888.91,-1004.87 938.91,-1004.87 988.91,-1004.87 1038.91,-1004.87 1088.91,-1004.87 1138.91,-1004.87 1188.91,-1004.87 1238.91,-1004.87 1288.91,-1004.87 1338.91,-1004.87 1388.91,-1004.87 1438.91,-1004.87 1488.91,-1004.87 1538.91,-1004.87 1588.91,-1004.87 1638.91,-1004.87 1688.91,-1004.87 1738.91,-1004.87 363.91,-954.87 563.91,-954.87 613.91,-954.87 663.91,-954.87 713.91,-954.87 763.91,-954.87 813.91,-954.87 863.91,-954.87 913.91,-954.87 963.91,-954.87 1013.91,-954.87 1063.91,-954.87 1113.91,-954.87 1163.91,-954.87 1213.91,-954.87 1263.91,-954.87 1313.91,-954.87 1363.91,-954.87 1413.91,-954.87 1463.91,-954.87 1513.91,-954.87 1563.91,-954.87 1613.91,-954.87 1663.91,-954.87 1713.91,-954.87 388.91,-904.87 438.91,-904.87 488.91,-904.87 538.91,-904.87 588.91,-904.87 638.91,-904.87 688.91,-904.87 738.91,-904.87 788.91,-904.87 838.91,-904.87 888.91,-904.87 938.91,-904.87 988.91,-904.87 1038.91,-904.87 1088.91,-904.87 1138.91,-904.87 1188.91,-904.87 1238.91,-904.87 1288.91,-904.87 1338.91,-904.87 1388.91,-904.87 1438.91,-904.87 1488.91,-904.87 1538.91,-904.87 1588.91,-904.87 1638.91,-904.87 1688.91,-904.87 1738.91,-904.87 363.91,-854.87 413.91,-854.87 463.91,-854.87 513.91,-854.87 563.91,-854.87 613.91,-854.87 663.91,-854.87 713.91,-854.87 763.91,-854.87 813.91,-854.87 863.91,-854.87 913.91,-854.87 963.91,-854.87 1013.91,-854.87 1063.91,-854.87 1113.91,-854.87 1163.91,-854.87 1213.91,-854.87 1263.91,-854.87 1313.91,-854.87 1363.91,-854.87 1413.91,-854.87 1463.91,-854.87 1513.91,-854.87 1563.91,-854.87 1613.91,-854.87 1663.91,-854.87 1713.91,-854.87 388.91,-804.87 438.91,-804.87 488.91,-804.87 538.91,-804.87 588.91,-804.87 638.91,-804.87 688.91,-804.87 738.91,-804.87 788.91,-804.87 838.91,-804.87 888.91,-804.87 938.91,-804.87 988.91,-804.87 1038.91,-804.87 1088.91,-804.87 1138.91,-804.87 1188.91,-804.87 1238.91,-804.87 1288.91,-804.87 1338.91,-804.87 1388.91,-804.87 1438.91,-804.87 1488.91,-804.87 1538.91,-804.87 1588.91,-804.87 1638.91,-804.87 1688.91,-804.87 1738.91,-804.87 363.91,-754.87 413.91,-754.87 463.91,-754.87 513.91,-754.87 563.91,-754.87 613.91,-754.87 663.91,-754.87 713.91,-754.87 763.91,-754.87 813.91,-754.87 863.91,-754.87 913.91,-754.87 963.91,-754.87 1013.91,-754.87 1063.91,-754.87 1113.91,-754.87 1163.91,-754.87 1213.91,-754.87 1263.91,-754.87 1313.91,-754.87 1363.91,-754.87 1413.91,-754.87 1463.91,-754.87 1513.91,-754.87 1563.91,-754.87 1613.91,-754.87 1663.91,-754.87 1713.91,-754.87 588.91,-704.87 638.91,-704.87 688.91,-704.87 738.91,-704.87 788.91,-704.87 838.91,-704.87 888.91,-704.87 938.91,-704.87 988.91,-704.87 1038.91,-704.87 1088.91,-704.87 1138.91,-704.87 1188.91,-704.87 1238.91,-704.87 1288.91,-704.87 1338.91,-704.87 1388.91,-704.87 1438.91,-704.87 1488.91,-704.87 1538.91,-704.87 1588.91,-704.87 1638.91,-704.87 1688.91,-704.87 1738.91,-704.87 613.91,-654.87 663.91,-654.87 713.91,-654.87 763.91,-654.87 813.91,-654.87 863.91,-654.87 913.91,-654.87 963.91,-654.87 1013.91,-654.87 1063.91,-654.87 1113.91,-654.87 1163.91,-654.87 1213.91,-654.87 1263.91,-654.87 1313.91,-654.87 1363.91,-654.87 1413.91,-654.87 1463.91,-654.87 1513.91,-654.87 1563.91,-654.87 1613.91,-654.87 1663.91,-654.87 1713.91,-654.87 588.91,-604.87 638.91,-604.87 688.91,-604.87 738.91,-604.87 788.91,-604.87 838.91,-604.87 888.91,-604.87 938.91,-604.87 988.91,-604.87 1038.91,-604.87 1088.91,-604.87 1138.91,-604.87 1188.91,-604.87 1238.91,-604.87 1288.91,-604.87 1338.91,-604.87 1388.91,-604.87 1438.91,-604.87 1488.91,-604.87 1538.91,-604.87 1588.91,-604.87 1638.91,-604.87 1688.91,-604.87 1738.91,-604.87 613.91,-554.87 663.91,-554.87 713.91,-554.87 763.91,-554.87 813.91,-554.87 863.91,-554.87 913.91,-554.87 963.91,-554.87 1013.91,-554.87 1063.91,-554.87 1113.91,-554.87 1163.91,-554.87 1213.91,-554.87 1263.91,-554.87 1313.91,-554.87 1363.91,-554.87 1413.91,-554.87 1463.91,-554.87 1513.91,-554.87 1563.91,-554.87 1613.91,-554.87 1663.91,-554.87 1713.91,-554.87 588.91,-504.87 638.91,-504.87 688.91,-504.87 738.91,-504.87 788.91,-504.87 838.91,-504.87 888.91,-504.87 938.91,-504.87 988.91,-504.87 1038.91,-504.87 1088.91,-504.87 1138.91,-504.87 1188.91,-504.87 1238.91,-504.87 1288.91,-504.87 1338.91,-504.87 1388.91,-504.87 1438.91,-504.87 1488.91,-504.87 1538.91,-504.87 1588.91,-504.87 1638.91,-504.87 1688.91,-504.87 1738.91,-504.87 363.91,-454.87 413.91,-454.87 463.91,-454.87 513.91,-454.87 563.91,-454.87 613.91,-454.87 663.91,-454.87 713.91,-454.87 763.91,-454.87 813.91,-454.87 863.91,-454.87 913.91,-454.87 963.91,-454.87 1013.91,-454.87 1063.91,-454.87 1113.91,-454.87 1163.91,-454.87 1213.91,-454.87 1263.91,-454.87 1313.91,-454.87 1363.91,-454.87 1413.91,-454.87 1463.91,-454.87 1513.91,-454.87 1563.91,-454.87 1613.91,-454.87 1663.91,-454.87 1713.91,-454.87
NetF1_2: F1.2 PS1.AC1
  other v1: -132.01,-1144.67 -82.01,-1144.67 -32.01,-1144.67 17.99,-1144.67 -107.01,-1094.67 -57.01,-1094.67 -7.01,-1094.67 42.99,-1094.67 242.99,-1094.67 -132.01,-1044.67 -82.01,-1044.67 -32.01,-1044.67 17.99,-1044.67 -107.01,-994.67 -57.01,-994.67 -7.01,-994.67 42.99,-994.67 242.99,-994.67 -132.01,-944.67 -82.01,-944.67 -32.01,-944.67 17.99,-944.67 217.99,-944.67 -107.01,-894.67 -57.01,-894.67 -7.01,-894.67 42.99,-894.67 92.99,-894.67 142.99,-894.67 192.99,-894.67 242.99,-894.67 -132.01,-844.67 -82.01,-844.67 -32.01,-844.67 17.99,-844.67 67.99,-844.67 117.99,-844.67 167.99,-844.67 217.99,-844.67 -107.01,-794.67 -57.01,-794.67 -7.01,-794.67 42.99,-794.67 92.99,-794.67 142.99,-794.67 192.99,-794.67 242.99,-794.67 -132.01,-744.67 -82.01,-744.67 -32.01,-744.67 17.99,-744.67 67.99,-744.67 117.99,-744.67 167.99,-744.67 217.99,-744.67 -107.01,-694.67 -57.01,-694.67 -7.01,-694.67 42.99,-694.67 92.99,-694.67 142.99,-694.67 192.99,-694.67 242.99,-694.67 -132.01,-644.67 -82.01,-644.67 -32.01,-644.67 17.99,-644.67 67.99,-644.67 117.99,-644.67 167.99,-644.67 217.99,-644.67 -107.01,-594.67 -57.01,-594.67 -7.01,-594.67 42.99,-594.67 92.99,-594.67 142.99,-594.67 192.99,-594.67 242.99,-594.67 -132.01,-544.67 -82.01,-544.67 -32.01,-544.67 17.99,-544.67 67.99,-544.67 -107.01,-494.67 -57.01,-494.67 -7.01,-494.67 42.99,-494.67 242.99,-494.67 -132.01,-444.67 -82.01,-444.67 -32.01,-444.67 17.99,-444.67 67.99,-444.67